# EAGLE board Uno (EAGLE 6.1)
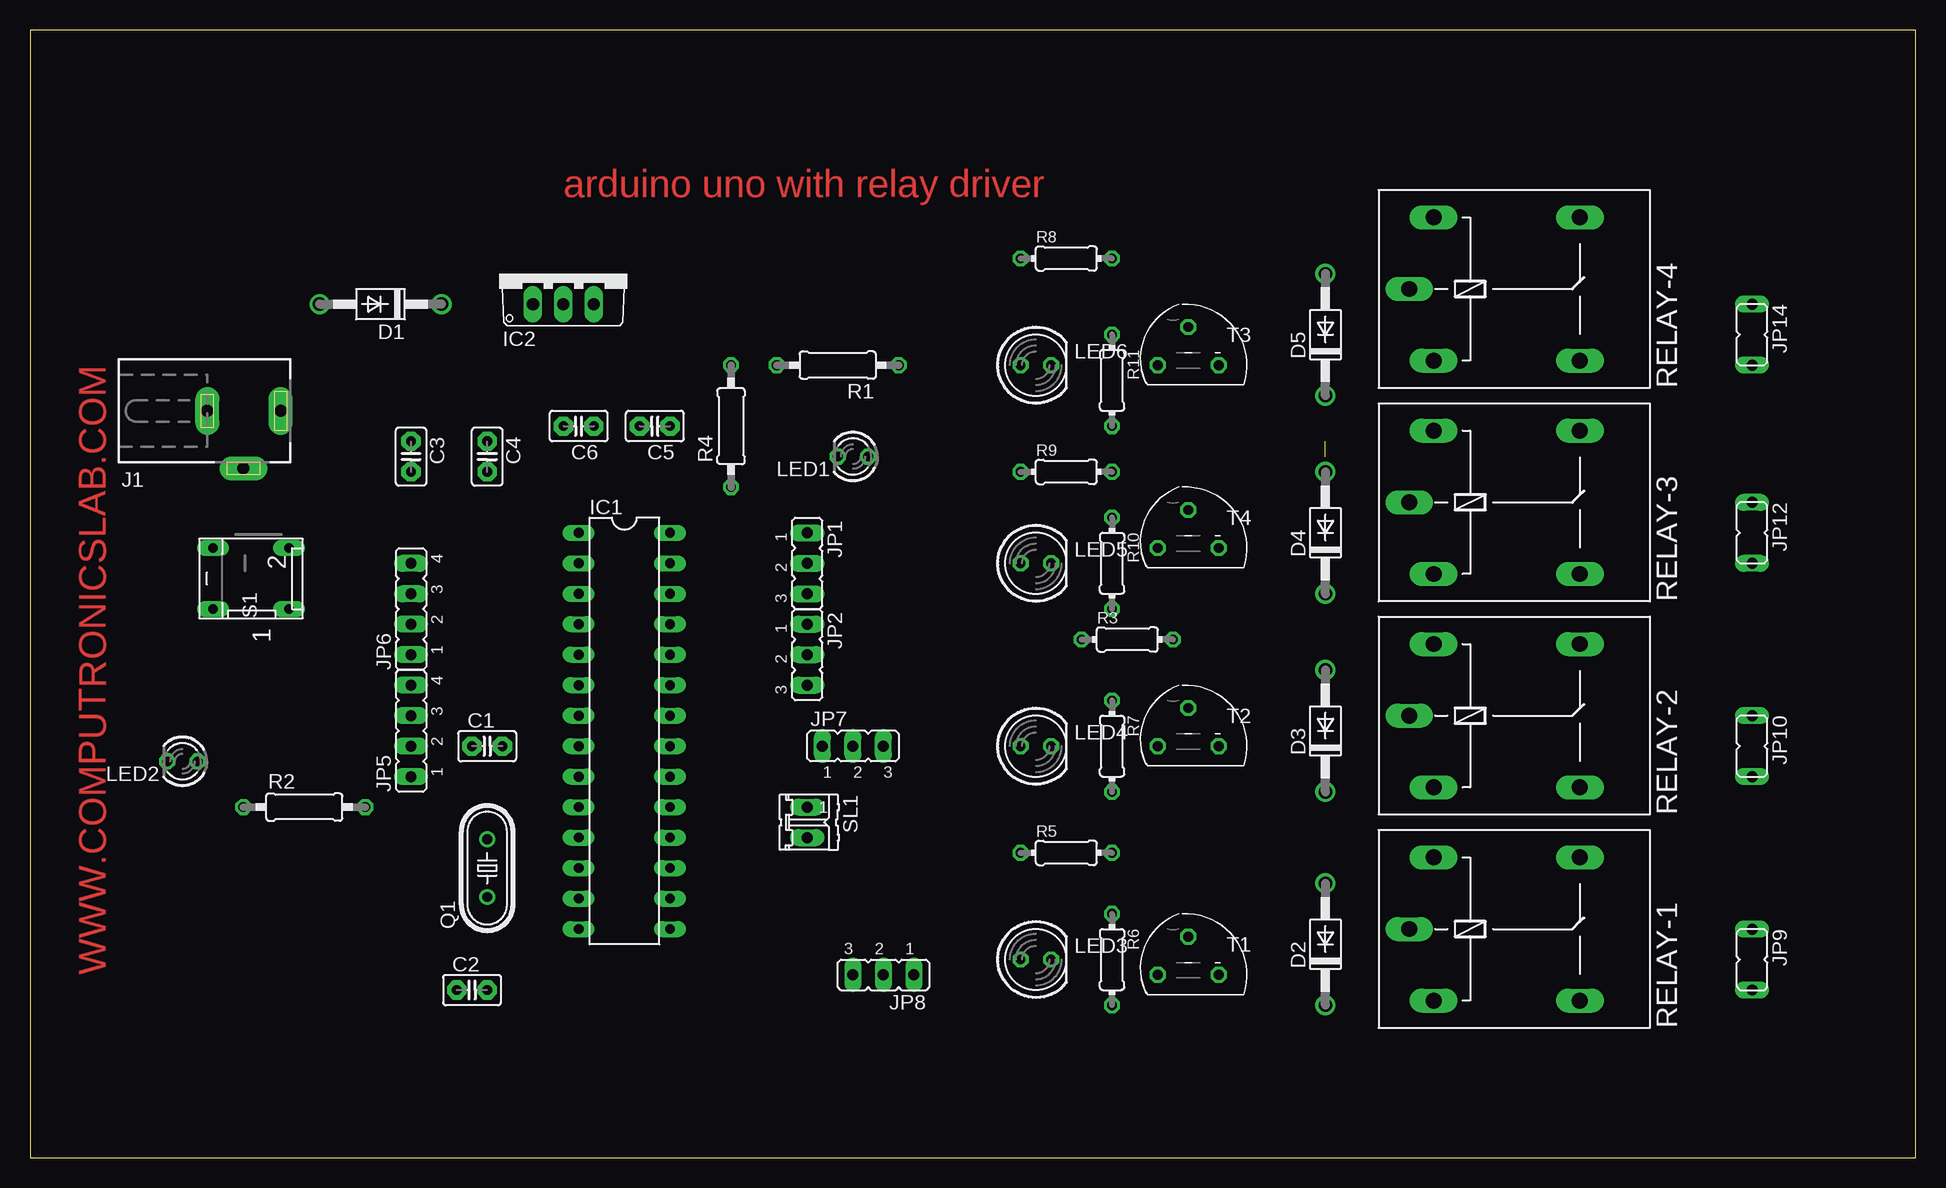
[diagram p0: board, top side]
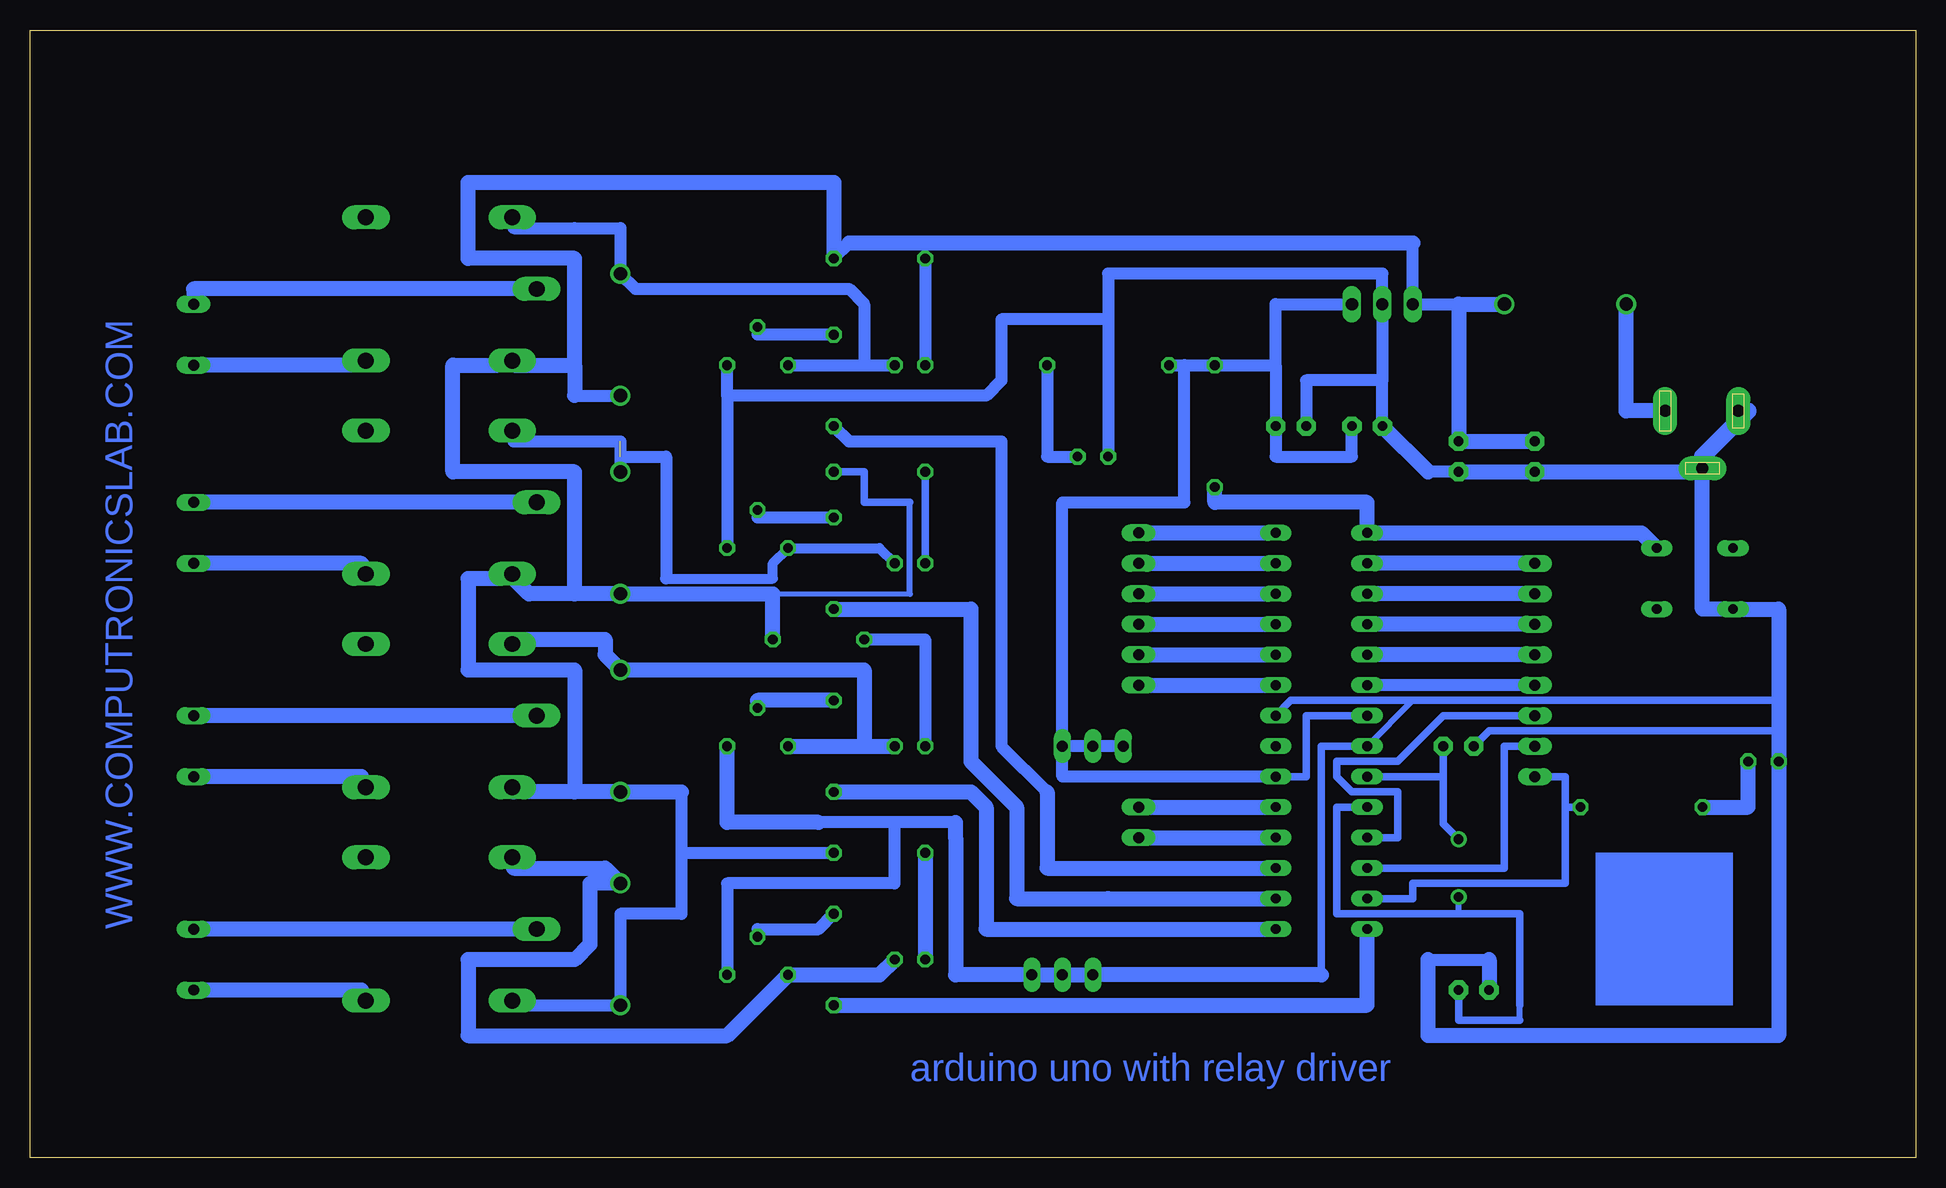
[diagram p1: board, bottom side, seen from below]

Size 157.15 x 93.97 mm. Coordinates in mm from the lower left corner, seen from the top.
Outline: 0,0 157.15,0 157.15,93.97 0,93.97 0,0
Copper layers (1*16): Top 0.035mm / dielectric 1.5mm / Bottom 0.035mm
Design rules: minimum track width 20mil, minimum drill 24mil, track to track 8mil, track to pad 8mil, pad to pad 8mil, via to via 8mil, smd to smd 8mil, copper to edge 40mil, drill to drill 8mil, minimum pad ring 10mil, minimum via ring 8mil, stop-mask expansion 4mil, vias tented up to drill 0mil, thermal gap 10mil

## Footprints (pad centres in the part's own frame; a part is rotated, then mirrored left to right if it is on the bottom)
C2.5-2 = drill 0.813 pad 1.6 octagon: 1 -1.27,0; 2 1.27,0
DO41-10 = drill 1.118: A 5.08,0; C -5.08,0
DIL28-3 = drill 0.813 long: 1 -16.51,-3.81; 2 -13.97,-3.81; 3 -11.43,-3.81; 4 -8.89,-3.81; 5 -6.35,-3.81; 6 -3.81,-3.81; 7 -1.27,-3.81; 8 1.27,-3.81; 9 3.81,-3.81; 10 6.35,-3.81; 11 8.89,-3.81; 12 11.43,-3.81; 13 13.97,-3.81; 14 16.51,-3.81; 15 16.51,3.81; 16 13.97,3.81; 17 11.43,3.81; 18 8.89,3.81; 19 6.35,3.81; 20 3.81,3.81; 21 1.27,3.81; 22 -1.27,3.81; 23 -3.81,3.81; 24 -6.35,3.81; 25 -8.89,3.81; 26 -11.43,3.81; 27 -13.97,3.81; 28 -16.51,3.81
TO220V = drill 1.016 long: 1 -2.54,-2.54; 2 0,-2.54; 3 2.54,-2.54
DCJ0303 = drill 1 pad 2 long: 1 0,3.1; 2 4.8,0; 3 0,-3
JP2 = drill 0.914 long: 1 -2.54,0; 2 0,0; 3 2.54,0
JP4 = drill 0.914 long: 1 -3.81,0; 2 -1.27,0; 3 1.27,0; 4 3.81,0
JP1 = drill 0.914 long: 1 0,-2.54; 2 0,2.54
LED3MM = drill 0.813 octagon: A -1.27,0; K 1.27,0
LED5MM = drill 0.813 octagon: A -1.27,0; K 1.27,0
HC49/S = drill 0.813: 1 -2.413,0; 2 2.413,0
0207/10 = drill 0.813 octagon: 1 -5.08,0; 2 5.08,0
0204/7 = drill 0.813 octagon: 1 -3.81,0; 2 3.81,0
G5LE = drill 1.321 long: 1 -7.493,-5.969; 2 -7.493,5.969; O 4.699,5.969; P -9.525,0; S 4.699,-5.969
DP-02 = drill 0.813 long: 1 -2.54,-2.54; 2 2.54,-2.54; 3 2.54,3.81; 4 -2.54,3.81
02P = drill 0.914 long: 1 -1.27,0; 2 1.27,0
TO92 = drill 0.813 octagon: 1 2.54,-1.27; 2 0,1.905; 3 -2.54,-1.27

## Placement (x,y rotation side)
C1  22pf  [C2.5-2]  38.1,34.29 0 top
C2  22pf  [C2.5-2]  36.83,13.97 0 top
C3  100UF  [C2.5-2]  31.75,58.42 270 top
C4  0.1uf  [C2.5-2]  38.1,58.42 270 top
C5  0.1uf  [C2.5-2]  52.07,60.96 180 top
C6  4.7uf  [C2.5-2]  45.72,60.96 180 top
D1  1N4007  [DO41-10]  29.21,71.12 180 top
D2  1N4007  [DO41-10]  107.95,17.78 90 top
D3  1N4007  [DO41-10]  107.95,35.56 90 top
D4  1N4007  [DO41-10]  107.95,52.07 90 top
D5  1N4007  [DO41-10]  107.95,68.58 90 top
IC1  ATMEGA328  [DIL28-3]  49.53,35.56 270 top
IC2  7805  [TO220V]  44.45,73.66 0 top
J1  [DCJ0303]  17.78,62.23 270 top
JP1  [JP2]  64.77,49.53 270 top
JP2  [JP2]  64.77,41.91 270 top
JP5  [JP4]  31.75,35.56 90 top
JP6  [JP4]  31.75,45.72 90 top
JP7  [JP2]  68.58,34.29 0 top
JP8  [JP2]  71.12,15.24 180 top
JP9  AC CONNECTOR  [JP1]  143.51,16.51 180 top
JP10  AC CONNECTOR  [JP1]  143.51,34.29 180 top
JP12  AC CONNECTOR  [JP1]  143.51,52.07 180 top
JP14  AC CONNECTOR  [JP1]  143.51,68.58 180 top
LED1  [LED3MM]  68.58,58.42 180 top
LED2  [LED3MM]  12.7,33.02 180 top
LED3  5MM  [LED5MM]  83.82,16.51 0 top
LED4  5MM  [LED5MM]  83.82,34.29 0 top
LED5  5MM  [LED5MM]  83.82,49.53 0 top
LED6  5MM  [LED5MM]  83.82,66.04 0 top
Q1  12MHZ  [HC49/S]  38.1,24.13 90 top
R1  220R  [0207/10]  67.31,66.04 180 top
R2  330R  [0207/10]  22.86,29.21 0 top
R3  1K  [0204/7]  91.44,43.18 0 top
R4  10K  [0207/10]  58.42,60.96 90 top
R5  1K  [0204/7]  86.36,25.4 0 top
R6  5.6K  [0204/7]  90.17,16.51 270 top
R7  5.6K  [0204/7]  90.17,34.29 270 top
R8  1K  [0204/7]  86.36,74.93 0 top
R9  1K  [0204/7]  86.36,57.15 0 top
R10  5.6K  [0204/7]  90.17,49.53 270 top
R11  5.6K  [0204/7]  90.17,64.77 270 top
RELAY-1  12V  [G5LE]  124.46,19.05 0 top
RELAY-2  12V  [G5LE]  124.46,36.83 0 top
RELAY-3  12V  [G5LE]  124.46,54.61 0 top
RELAY-4  12V  [G5LE]  124.46,72.39 0 top
S1  [DP-02]  19.05,48.26 90 top
SL1  [02P]  64.77,27.94 270 top
T1  BC547  [TO92]  96.52,16.51 0 top
T2  BC547  [TO92]  96.52,35.56 0 top
T3  BC547  [TO92]  96.52,67.31 0 top
T4  BC547  [TO92]  96.52,52.07 0 top

## Library data of the parts
C1-C6 = capacitor-wima
D1-D5 = diode
IC1 = quantum-research-group; OC_FARNELL: unknown; OC_NEWARK: unknown
IC2 = linear
J1 = con-jack; OC_FARNELL: unknown; OC_NEWARK: unknown
JP1 JP2 JP5-JP10 JP12 JP14 = jumper
LED1-LED6 = led
Q1 = crystal; OC_FARNELL: 1667008; OC_NEWARK: unknown
R1-R11 = rcl
RELAY-1-RELAY-4 = relay; OC_FARNELL: unknown; OC_NEWARK: unknown
S1 = switch-dil; MPN: MCDP02; OC_FARNELL: 1255233; OC_NEWARK: 26M1095
SL1 = con-amp-quick; OC_FARNELL: unknown; OC_NEWARK: unknown
T1-T4 = transistor

## Nets
N$1: C1.2 IC1.9 Q1.2
N$2: C2.2 IC1.10 Q1.1
N$3: D1.A J1.1
N$4: C5.1 C6.1 IC1.7 IC1.20 IC2.3 JP7.1 JP7.2 JP7.3 R1.2 R4.2
N$5: IC1.18 SL1.2
N$6: LED1.A R1.1
N$7: C3.1 C4.1 D1.C D2.C D3.C D4.C D5.C IC2.1 R3.2 R5.2 R8.2 R9.2 RELAY-1.1 RELAY-2.1 RELAY-3.1 RELAY-4.1
N$8: IC1.28 JP1.1
N$9: IC1.27 JP1.2
N$10: IC1.26 JP1.3
N$11: IC1.25 JP2.1
N$12: IC1.24 JP2.2
N$13: IC1.23 JP2.3
N$14: IC1.5 JP6.1
N$15: IC1.2 JP6.4
N$16: IC1.3 JP6.3
N$17: IC1.4 JP6.2
N$18: IC1.6 JP5.4
N$19: IC1.12 JP5.2
N$20: IC1.11 JP5.3
N$21: IC1.13 JP5.1 R2.2
N$27: IC1.19 SL1.1
N$28: D2.A LED3.K RELAY-1.2 T1.3
N$29: R7.1 T2.2
N$30: R6.1 T1.2
N$31: IC1.1 R4.1 S1.2
N$32: LED2.A R2.1
N$33: LED3.A R5.1
N$34: LED4.A R3.1
N$35: JP9.2 RELAY-1.S
N$36: JP9.1 RELAY-1.P
N$38: JP10.2 RELAY-2.S
N$39: JP10.1 RELAY-2.P
N$41: IC1.14 R6.2
N$42: D3.A LED4.K RELAY-2.2 T2.3
N$43: D4.A LED5.K RELAY-3.2 T4.3
N$45: R11.1 T3.2
N$46: R10.1 T4.2
N$47: LED5.A R9.1
N$48: LED6.A R8.1
N$49: JP12.2 RELAY-3.S
N$50: JP12.1 RELAY-3.P
N$51: JP14.2 RELAY-4.S
N$53: JP14.1 RELAY-4.P
N$55: C1.1 C2.1 C3.2 C4.2 C5.2 C6.2 IC1.8 IC1.22 IC2.2 J1.2 J1.3 JP8.1 JP8.2 JP8.3 LED1.K LED2.K S1.4 T1.1 T2.1 T3.1 T4.1
N$56: IC1.16 R10.2
N$57: IC1.17 R11.2
N$58: D5.A LED6.K RELAY-4.2 T3.3
N$59: IC1.15 R7.2

## Tracks (layer width: path | path; a pad name or v marks a point on that pad's centre or on a via)
N$1
  Bottom 0.508: 39.37,27.94 39.37,27.81
  Bottom 0.61: C1.2 39.37,31.75 | 39.37,31.75 39.37,27.94 | 39.37,27.81 Q1.2 | 39.37,31.75 IC1.9
N$2
  Bottom 0.508: 36.83,20.32 38.1,20.32 Q1.1 | 33.02,11.43 33.02,12.7
  Bottom 0.61: 33.02,12.7 33.02,20.32 36.83,20.32 48.26,20.32 48.26,29.21 IC1.10 | 33.02,11.43 38.1,11.43 C2.2
N$3
  Bottom 1.27: D1.A 24.13,62.23 J1.1
N$4
  Bottom 0.508: JP7.3 JP7.2 JP7.1
  Bottom 0.61: IC1.20 50.8,31.75 50.8,36.83 IC1.7
  Bottom 1.016: C6.1 46.99,58.42 53.34,58.42 C5.1 53.34,66.04 | R1.2 60.96,66.04 | 60.96,66.04 R4.2 53.34,66.04 | IC2.3 53.34,71.12 53.34,66.04 | JP7.3 71.12,31.75 IC1.20 | 60.96,66.04 60.96,54.61 71.12,54.61 JP7.3 | JP7.1 JP7.3
N$5
  Bottom 1.27: SL1.2 IC1.18
N$6
  Bottom 1.016: LED1.A 72.39,58.42 R1.1
N$7
  Bottom 0.406: 95.25,46.99 83.82,46.99
  Bottom 0.508: 116.84,12.7 RELAY-1.1 | 116.84,30.48 RELAY-2.1 | 83.82,46.99 83.82,54.61 | 116.84,48.26 RELAY-3.1 | D4.C 111.76,46.99
  Bottom 0.61: 83.82,54.61 87.63,54.61 87.63,57.15 R9.2
  Bottom 1.016: 88.9,76.2 R8.2 | 41.91,76.2 IC2.1 38.1,71.12 | 116.84,12.7 D2.C 107.95,20.32 102.87,20.32 102.87,25.4 | 102.87,25.4 R5.2 | 102.87,30.48 102.87,25.4 | 111.76,63.5 D5.C | 116.84,66.04 RELAY-4.1 118.11,66.04
  Bottom 1.27: C3.1 C4.1 38.1,71.12 D1.C | 41.91,76.2 88.9,76.2 | 102.87,30.48 D3.C 111.76,30.48 | 111.76,30.48 116.84,30.48 | 116.84,66.04 111.76,66.04 | 111.76,66.04 111.76,63.5 | R3.2 95.25,46.99 D4.C 115.57,46.99 116.84,48.26 | 118.11,66.04 121.92,66.04 121.92,57.15 111.76,57.15 111.76,46.99 | 111.76,30.48 111.76,40.64 120.65,40.64 120.65,48.26 118.11,48.26 RELAY-3.1 | R8.2 90.17,81.28 120.65,81.28 120.65,74.93 111.76,74.93 111.76,66.04
N$8
  Bottom 1.27: JP1.1 IC1.28
N$9
  Bottom 1.27: JP1.2 IC1.27
N$10
  Bottom 1.27: JP1.3 IC1.26
N$11
  Bottom 1.27: JP2.1 IC1.25
N$12
  Bottom 1.27: JP2.2 IC1.24
N$13
  Bottom 1.27: JP2.3 IC1.23
N$14
  Bottom 1.27: JP6.1 IC1.5
N$15
  Bottom 1.27: JP6.4 IC1.2
N$16
  Bottom 1.27: JP6.3 IC1.3
N$17
  Bottom 1.27: JP6.2 IC1.4
N$18
  Bottom 1.016: JP5.4 IC1.6
N$19
  Bottom 0.61: IC1.12 34.29,24.13 34.29,34.29 JP5.2
N$20
  Bottom 0.61: IC1.11 43.18,26.67 43.18,30.48 46.99,30.48 48.26,31.75 48.26,33.02 43.18,33.02 39.37,36.83 JP5.3
N$21
  Bottom 0.61: 29.21,29.21 29.21,31.75 JP5.1 | 29.21,29.21 R2.2 | IC1.13 41.91,21.59 41.91,22.86 29.21,22.86 29.21,29.21
N$27
  Bottom 1.27: SL1.1 IC1.19
N$28
  Bottom 1.27: LED3.K 86.36,15.24 T1.3 99.06,10.16 120.65,10.16 120.65,16.51 111.76,16.51 110.49,17.78 110.49,22.86 D2.A 109.22,24.13 116.84,24.13 RELAY-1.2
N$29
  Bottom 0.508: 96.52,38.1 T2.2
  Bottom 1.27: R7.1 96.52,38.1
N$30
  Bottom 0.508: 96.52,19.05 T1.2
  Bottom 1.016: R6.1 91.44,19.05 96.52,19.05
N$31
  Bottom 1.27: S1.2 22.86,52.07 IC1.1 45.72,54.61 58.42,54.61 R4.1
N$32
  Bottom 1.27: R2.1 13.97,29.21 LED2.A
N$33
  Bottom 1.27: R5.1 LED3.A
N$34
  Bottom 1.016: R3.1 82.55,43.18 LED4.A
N$35
  Bottom 1.27: JP9.2 129.54,13.97 RELAY-1.S
N$36
  Bottom 1.27: RELAY-1.P JP9.1
N$38
  Bottom 1.27: JP10.2 129.54,31.75 RELAY-2.S
N$39
  Bottom 1.27: RELAY-2.P JP10.1
N$41
  Bottom 1.27: IC1.14 45.72,12.7 R6.2
N$42
  Bottom 1.27: T2.3 87.63,34.29 | 87.63,34.29 LED4.K | RELAY-2.2 116.84,43.18 109.22,43.18 109.22,41.91 D3.A 87.63,40.64 87.63,34.29
N$43  (1 unrouted)
  Bottom 0.813: LED5.K 86.36,50.8 T4.3 95.25,49.53 95.25,48.26 104.14,48.26
  Bottom 1.016: D4.A 107.95,59.69 116.84,59.69 RELAY-3.2 | 107.95,58.42 104.14,58.42 104.14,48.26
N$45
  Bottom 0.508: 96.52,68.58 T3.2
  Bottom 1.016: R11.1 96.52,68.58
N$46
  Bottom 0.508: 96.52,53.34 T4.2
  Bottom 1.016: R10.1 96.52,53.34
N$47
  Bottom 0.61: R9.1 LED5.A
N$48
  Bottom 1.016: R8.1 LED6.A
N$49
  Bottom 1.27: JP12.2 129.54,49.53 RELAY-3.S
N$50
  Bottom 1.27: RELAY-3.P JP12.1
N$51
  Bottom 1.016: 129.54,66.04 RELAY-4.S
  Bottom 1.27: 129.54,66.04 JP14.2
N$53
  Bottom 1.27: JP14.1 143.51,72.39 RELAY-4.P
N$55
  Bottom 0.508: 41.91,38.1 IC1.8 | 17.78,57.15 J1.2
  Bottom 0.61: 11.43,38.1 41.91,38.1 52.07,38.1 IC1.22 | C1.1 35.56,35.56 11.43,35.56 | 49.53,15.24 49.53,34.29 IC1.8
  Bottom 1.016: C4.2 40.64,57.15 | C5.2 50.8,64.77 44.45,64.77 | C6.2 44.45,64.77 | 99.06,63.5 T4.1 | 67.31,69.85 LED1.K | 67.31,69.85 67.31,73.66 44.45,73.66 IC2.2 44.45,64.77 | 99.06,63.5 77.47,63.5 76.2,64.77 76.2,69.85 67.31,69.85 | 99.06,63.5 T3.1 | T1.1 99.06,22.86 85.09,22.86 85.09,27.94 | 80.01,27.94 85.09,27.94 | 85.09,27.94 91.44,27.94 | 40.64,16.51 35.56,16.51
  Bottom 1.27: 17.78,58.42 J1.2 | C4.2 C3.2 17.78,57.15 17.78,45.72 S1.4 11.43,45.72 11.43,38.1 11.43,35.56 LED2.K 11.43,10.16 40.64,10.16 40.64,16.51 | 40.64,57.15 C6.2 | 80.01,27.94 80.01,26.67 80.01,15.24 JP8.1 JP8.2 JP8.3 49.53,15.24 | T2.1 99.06,27.94 91.44,27.94 | 35.56,16.51 C2.1
  Bottom 1.422: 17.78,58.42 13.97,62.23 J1.3
N$56
  Bottom 1.27: IC1.16 67.31,21.59 74.93,21.59 74.93,29.21 78.74,33.02 78.74,41.91 78.74,45.72 R10.2
N$57
  Bottom 1.016: 72.39,30.48 76.2,34.29 76.2,59.69 88.9,59.69 R11.2
  Bottom 1.27: IC1.17 72.39,24.13 72.39,30.48
N$58
  Bottom 1.016: T3.3 87.63,66.04 | 87.63,66.04 LED6.K | RELAY-4.2 116.84,77.47 111.76,77.47 107.95,77.47 D5.A 106.68,72.39 88.9,72.39 87.63,71.12 87.63,66.04
N$59
  Bottom 1.27: IC1.15 77.47,19.05 77.47,29.21 78.74,30.48 R7.2
(copper drawn outside any net)
  shapes: Bottom area x1

## Text on the board
Top: arduino uno with relay driver | WWW.COMPUTRONICSLAB.COM
Bottom: WWW.COMPUTRONICSLAB.COM | arduino uno with relay driver